# EAGLE board CT_schematic (EAGLE 7.6.0)

Size 100 x 80 mm. Coordinates in mm from the lower left corner, seen from the top.
Outline: 0,0 100,0 100,80 0,80 0,0
Copper layers (1*16): Top 0.035mm / dielectric 1.5mm / Bottom 0.035mm
Design rules "default": minimum track width 10mil, minimum drill 24mil, track to track 8mil, track to pad 8mil, pad to pad 8mil, via to via 8mil, smd to smd 8mil, copper to edge 40mil, drill to drill 8mil, minimum pad ring 10mil, minimum via ring 8mil, stop-mask expansion 4mil, vias tented up to drill 0mil, thermal gap 10mil

## Footprints (pad centres in the part's own frame; a part is rotated, then mirrored left to right if it is on the bottom)
C0603 = smd 0.8 x 0.8: 1 -0.762,0; 2 0.762,0
C0402 = smd 0.5 x 0.5: 1 -0.508,0; 2 0.508,0
C1206 = smd 1.3 x 1.6: 1 -1.524,0; 2 1.524,0
C0805 = smd 1.2 x 1.3: 1 -1.016,0; 2 1.016,0
C1210 = smd 1.2 x 2.5: 1 -1.524,0; 2 1.524,0
EXV-9H = smd 3.505 x 1.676: 1 -2.857,0; 2 2.857,0
PJ-037B_PACKAGE = drill 3.7 square: 1 12,0 | drill 3.2 square: 2 6,0
R0603 = smd 0.8 x 0.8: 1 -0.762,0; 2 0.762,0
LQFP144 = smd 0.35 x 1.35: 1 -8.75,-10.625; 2 -8.25,-10.625; 3 -7.75,-10.625; 4 -7.25,-10.625; 5 -6.75,-10.625; 6 -6.25,-10.625; 7 -5.75,-10.625; 8 -5.25,-10.625; 9 -4.75,-10.625; 10 -4.25,-10.625; 11 -3.75,-10.625; 12 -3.25,-10.625; 13 -2.75,-10.62; 14 -2.25,-10.625; 15 -1.75,-10.625; 16 -1.25,-10.625; 17 -0.75,-10.625; 18 -0.25,-10.625; 19 0.25,-10.625; 20 0.75,-10.625; 21 1.25,-10.625; 22 1.75,-10.625; 23 2.25,-10.625; 24 2.75,-10.62; 25 3.25,-10.625; 26 3.75,-10.625; 27 4.25,-10.625; 28 4.75,-10.625; 29 5.25,-10.625; 30 5.75,-10.625; 31 6.25,-10.625; 32 6.75,-10.625; 33 7.25,-10.625; 34 7.75,-10.625; 35 8.25,-10.625; 36 8.75,-10.625; 73 8.75,10.625; 74 8.25,10.625; 75 7.75,10.625; 76 7.25,10.625; 77 6.75,10.625; 78 6.25,10.625; 79 5.75,10.625; 80 5.25,10.625; 81 4.75,10.625; 82 4.25,10.625; 83 3.75,10.625; 84 3.25,10.625; 85 2.75,10.625; 86 2.25,10.625; 87 1.75,10.625; 88 1.25,10.625; 89 0.75,10.625; 90 0.25,10.625; 91 -0.25,10.625; 92 -0.75,10.625; 93 -1.25,10.625; 94 -1.75,10.625; 95 -2.25,10.625; 96 -2.75,10.625; 97 -3.25,10.625; 98 -3.75,10.625; 99 -4.25,10.625; 100 -4.75,10.625; 101 -5.25,10.625; 102 -5.75,10.625; 103 -6.25,10.625; 104 -6.75,10.625; 105 -7.25,10.625; 106 -7.75,10.625; 107 -8.25,10.625; 108 -8.75,10.625 | smd 1.35 x 0.35: 37 10.625,-8.75; 38 10.625,-8.25; 39 10.625,-7.75; 40 10.625,-7.25; 41 10.625,-6.75; 42 10.625,-6.25; 43 10.625,-5.75; 44 10.625,-5.25; 45 10.625,-4.75; 46 10.625,-4.25; 47 10.625,-3.75; 48 10.625,-3.25; 49 10.625,-2.75; 50 10.625,-2.25; 51 10.625,-1.75; 52 10.625,-1.25; 53 10.625,-0.75; 54 10.625,-0.25; 55 10.625,0.25; 56 10.625,0.75; 57 10.625,1.25; 58 10.625,1.75; 59 10.625,2.25; 60 10.625,2.75; 61 10.625,3.25; 62 10.625,3.75; 63 10.625,4.25; 64 10.625,4.75; 65 10.625,5.25; 66 10.625,5.75; 67 10.625,6.25; 68 10.625,6.75; 69 10.625,7.25; 70 10.625,7.75; 71 10.625,8.25; 72 10.625,8.75; 109 -10.625,8.75; 110 -10.625,8.25; 111 -10.625,7.75; 112 -10.625,7.25; 113 -10.625,6.75; 114 -10.625,6.25; 115 -10.625,5.75; 116 -10.625,5.25; 117 -10.625,4.75; 118 -10.625,4.25; 119 -10.625,3.75; 120 -10.625,3.25; 121 -10.625,2.75; 122 -10.625,2.25; 123 -10.625,1.75; 124 -10.625,1.25; 125 -10.625,0.75; 126 -10.625,0.25; 127 -10.625,-0.25; 128 -10.625,-0.75; 129 -10.625,-1.25; 130 -10.625,-1.75; 131 -10.625,-2.25; 132 -10.625,-2.75; 133 -10.625,-3.25; 134 -10.625,-3.75; 135 -10.625,-4.25; 136 -10.625,-4.75; 137 -10.625,-5.25; 138 -10.625,-5.75; 139 -10.625,-6.25; 140 -10.625,-6.75; 141 -10.625,-7.25; 142 -10.625,-7.75; 143 -10.625,-8.25; 144 -10.625,-8.75
SOIC-8 = smd 1.6 x 0.6: 1 -2.7,1.905 | smd 1.55 x 0.6: 2 -2.7,0.635; 3 -2.7,-0.635; 4 -2.7,-1.905; 5 2.7,-1.905; 6 2.7,-0.635; 7 2.7,0.635; 8 2.7,1.905
QFN-32 = smd 0.6 x 0.3: 1 -2.3,1.75; 2 -2.3,1.25; 3 -2.3,0.75; 4 -2.3,0.25; 5 -2.3,-0.25; 6 -2.3,-0.75; 7 -2.3,-1.25; 8 -2.3,-1.75; 17 2.3,-1.75; 18 2.3,-1.25; 19 2.3,-0.75; 20 2.3,-0.25; 21 2.3,0.25; 22 2.3,0.75; 23 2.3,1.25; 24 2.3,1.75 | smd 0.3 x 0.6: 9 -1.75,-2.3; 10 -1.25,-2.3; 11 -0.75,-2.3; 12 -0.25,-2.3; 13 0.25,-2.3; 14 0.75,-2.3; 15 1.25,-2.3; 16 1.75,-2.3; 25 1.75,2.3; 26 1.25,2.3; 27 0.75,2.3; 28 0.25,2.3; 29 -0.25,2.3; 30 -0.75,2.3; 31 -1.25,2.3; 32 -1.75,2.3 | smd 3.2 x 3.2: EXP 0,0
SJ-43515TS-SMT-TR = smd 2.2 x 3: 1 0.6,-7.4; 4 3.4,-7.4 | smd 3 x 3: 2 12.8,-7.4; 5 17,-3 | smd 2 x 3: 3 5.3,0; 6 2.5,0 | drill 1.8: P$7 4.5,-3.69; P$8 11.54,-3.69
WM-64PC = drill 0.6 pad 1: 1 -1,0.95; 2 -1,-0.95
ABLS-25.000MHZ-B2F-T = smd 5.6 x 2.8: 1 -3.81,0; 2 5.69,0
ASEK = smd 1.4 x 1: 1 -1.1,-0.8; 2 1.1,-0.8; 3 1.1,0.8; 4 -1.1,0.8
ASFL1 = smd 1.7 x 1.5: 1 -1.27,-1.1; 2 1.27,-1.1; 3 1.27,1.1; 4 -1.27,1.1
WSON-8 = smd 0.3 x 0.6: 1 -0.75,0; 2 0.05,0; 3 0.85,0; 4 1.65,0; 5 1.65,3.8; 6 0.85,3.8; 7 0.05,3.8; 8 -0.75,3.8 | smd 3 x 2.6: PAD 0.45,1.9
SON-6 = smd 0.55 x 0.3: 1 -0.355,0.5 | smd 0.52 x 0.3: 2 -0.37,0; 3 -0.37,-0.5; 4 0.37,-0.5; 5 0.37,0; 6 0.37,0.5
SW_4-1437565-2 = smd 1.4 x 2.1: 1 -2.23,4.55; 2 -2.23,-4.55; 3 2.23,4.55; 4 2.23,-4.55
LGM67K-G1J2-24-Z = smd 0.8 x 1.4: A -2,0; C 0,0
NC7SZ125M5X = smd 1.3 x 0.7: 1 -1.3,0.95; 2 -1.3,0; 3 -1.3,-0.95; 4 1.3,-0.95; 5 1.3,0.95

## Placement (x,y rotation side)
C1  1e-07  [C0603]  -19.05,85.09 0 top  (outside the outline)
C2  1e-07  [C0603]  -22.86,85.09 0 top  (outside the outline)
C3  1e-07  [C0603]  -26.67,85.09 0 top  (outside the outline)
C4  1e-07  [C0603]  -30.48,85.09 0 top  (outside the outline)
C5  1e-07  [C0603]  -34.29,85.09 0 top  (outside the outline)
C6  1e-07  [C0603]  -38.1,85.09 0 top  (outside the outline)
C7  1e-07  [C0603]  -41.91,85.09 0 top  (outside the outline)
C8  1e-07  [C0603]  -45.72,85.09 0 top  (outside the outline)
C9  1e-07  [C0603]  -49.53,85.09 0 top  (outside the outline)
C10  1e-07  [C0603]  -53.34,85.09 0 top  (outside the outline)
C11  1e-07  [C0603]  -57.15,85.09 0 top  (outside the outline)
C12  4.7e-06  [C0603]  -15.24,85.09 0 top  (outside the outline)
C13  1e-07  [C0603]  -60.96,85.09 0 top  (outside the outline)
C14  1e-08  [C0603]  -64.77,85.09 0 top  (outside the outline)
C15  1e-06  [C0603]  -68.58,85.09 0 top  (outside the outline)
C16  1e-11  [C0402]  -64.77,90.17 0 top  (outside the outline)
C17  1e-11  [C0402]  -68.58,90.17 0 top  (outside the outline)
C18  1e-08  [C0402]  -72.39,90.17 0 top  (outside the outline)
C19  1e-08  [C0402]  -76.2,90.17 0 top  (outside the outline)
C20  1e-08  [C0402]  -80.01,90.17 0 top  (outside the outline)
C21  1e-06  [C0603]  -72.39,85.09 0 top  (outside the outline)
C22  1e-06  [C0603]  -76.2,85.09 0 top  (outside the outline)
C23  1e-06  [C0603]  -80.01,85.09 0 top  (outside the outline)
C24  1e-06  [C0603]  -83.82,85.09 0 top  (outside the outline)
C25  1e-06  [C0603]  -15.24,90.17 0 top  (outside the outline)
C26  1e-06  [C0603]  -19.05,90.17 0 top  (outside the outline)
C27  1e-06  [C0603]  -22.86,90.17 0 top  (outside the outline)
C28  1e-07  [C0402]  -83.82,90.17 0 top  (outside the outline)
C29  1e-07  [C0402]  -15.24,95.25 0 top  (outside the outline)
C30  1e-07  [C0402]  -19.05,95.25 0 top  (outside the outline)
C31  1e-07  [C0402]  -22.86,95.25 0 top  (outside the outline)
C32  1e-06  [C0603]  -26.67,90.17 0 top  (outside the outline)
C33  1e-08  [C0402]  -26.67,95.25 0 top  (outside the outline)
C34  1e-08  [C0402]  -30.48,95.25 0 top  (outside the outline)
C35  1e-08  [C0402]  -34.29,95.25 0 top  (outside the outline)
C36  1e-05  [C1206]  -55.88,72.39 0 top  (outside the outline)
C37  1e-05  [C0805]  -73.66,72.39 0 top  (outside the outline)
C38  1e-08  [C0402]  -38.1,95.25 0 top  (outside the outline)
C39  1e-05  [C1206]  -62.23,72.39 0 top  (outside the outline)
C40  1e-05  [C1210]  -49.53,72.39 0 top  (outside the outline)
C41  1e-07  [C0402]  -41.91,95.25 0 top  (outside the outline)
C42  0.0001  [EXV-9H]  -57.15,64.77 0 top  (outside the outline)
C43  0.0001  [EXV-9H]  -68.58,64.77 0 top  (outside the outline)
C44  1e-08  [C0402]  -45.72,95.25 0 top  (outside the outline)
J1  PJ-037B  [PJ-037B_PACKAGE]  -83.82,30.48 0 top  (outside the outline)
R2  1000.0  [R0603]  -30.48,90.17 0 top  (outside the outline)
R4  4700.0  [R0603]  -34.29,90.17 0 top  (outside the outline)
R5  10000.0  [R0603]  -25.4,80.01 0 top  (outside the outline)
R6  10000.0  [R0603]  -30.48,80.01 0 top  (outside the outline)
R7  10000.0  [R0603]  -35.56,80.01 0 top  (outside the outline)
R8  10000.0  [R0603]  -40.64,80.01 0 top  (outside the outline)
R9  10000.0  [R0603]  -45.72,80.01 0 top  (outside the outline)
R10  10000.0  [R0603]  -50.8,80.01 0 top  (outside the outline)
R11  10000.0  [R0603]  -55.88,80.01 0 top  (outside the outline)
R12  10000.0  [R0603]  -60.96,80.01 0 top  (outside the outline)
R13  10000.0  [R0603]  -66.04,80.01 0 top  (outside the outline)
R14  10000.0  [R0603]  -71.12,80.01 0 top  (outside the outline)
R15  1270.0  [R0603]  -38.1,90.17 0 top  (outside the outline)
R16  1270.0  [R0603]  -41.91,90.17 0 top  (outside the outline)
R17  100000.0  [R0603]  -78.74,71.12 0 top  (outside the outline)
R18  200.0  [R0603]  -45.72,90.17 0 top  (outside the outline)
R19  1000.0  [R0603]  -49.53,90.17 0 top  (outside the outline)
R20  100000.0  [R0603]  -83.82,71.12 0 top  (outside the outline)
R21  2231.0  [R0603]  -53.34,90.17 0 top  (outside the outline)
R22  1000.0  [R0603]  -57.15,90.17 0 top  (outside the outline)
R23  10000.0  [R0603]  -76.2,80.01 0 top  (outside the outline)
R24  10000.0  [R0603]  -81.28,80.01 0 top  (outside the outline)
R25  9100.0  [R0603]  -60.96,90.17 0 top  (outside the outline)
R26  680000.0  [R0603]  -15.24,80.01 0 top  (outside the outline)
R27  120000.0  [R0603]  -20.32,80.01 0 top  (outside the outline)
U1  STM32L162ZDT6  [LQFP144]  -24.13,11.43 0 top  (outside the outline)
U2  AT25160B-SSHL-T  [SOIC-8]  -69.85,43.18 0 top  (outside the outline)
U3  AT25512N-SH-T  [SOIC-8]  -38.1,55.88 0 top  (outside the outline)
U4  AT25M02-SSHD-T  [SOIC-8]  -24.13,55.88 0 top  (outside the outline)
U5  SGTL5000XNAA3  [QFN-32]  -53.34,43.18 0 top  (outside the outline)
U6  SJ-43515TS-SMT-TR  [SJ-43515TS-SMT-TR]  -62.23,10.16 0 top  (outside the outline)
U7  SJ-43515TS-SMT-TR  [SJ-43515TS-SMT-TR]  -39.37,33.02 0 top  (outside the outline)
U8  SJ-43515TS-SMT-TR  [SJ-43515TS-SMT-TR]  -67.31,33.02 0 top  (outside the outline)
U9  WM-64PCT  [WM-64PC]  -39.37,43.18 0 top  (outside the outline)
U10  ABLS-25.000MHZ-B2F-T  [ABLS-25.000MHZ-B2F-T]  -26.67,73.66 0 top  (outside the outline)
U11  ASEK-32.768KHz-ECST  [ASEK]  -48.26,64.77 0 top  (outside the outline)
U12  ASFL-24.57MHZ-NCS  [ASFL1]  -27.94,64.77 0 top  (outside the outline)
U13  LP3878SDX-ADJ/NOPB  [WSON-8]  -59.69,53.34 0 top  (outside the outline)
U14  LP3878SDX-ADJ/NOPB  [WSON-8]  -80.01,53.34 0 top  (outside the outline)
U15  TPS3895ADRYR  [SON-6]  -48.26,93.98 0 top  (outside the outline)
U16  4-1437565-2  [SW_4-1437565-2]  -27.94,44.45 0 top  (outside the outline)
U17  Q65110A2395  [LGM67K-G1J2-24-Z]  -38.1,72.39 0 top  (outside the outline)
U18  nc7sz125m5x  [NC7SZ125M5X]  -67.31,71.12 0 top  (outside the outline)

## Library data of the parts
C1-C44 J1 R2 R4-R27 U1-U18 = circuit_tree

## Nets
CLK_CRYSTAL_U1_23: C16.1 U1.23 U10.1
CLK_CRYSTAL_U1_24: C17.1 U1.24 U10.2
CLK_U1_8: U1.8 U11.3
CLK_U5_21: U5.21 U12.3
GND: C1.2 C2.2 C3.2 C4.2 C5.2 C6.2 C7.2 C8.2 C9.2 C10.2 C11.2 C12.2 C13.2 C14.2 C15.2 C16.2 C17.2 C18.2 C19.2 C20.2 C28.2 C29.2 C30.2 C31.2 C32.2 C33.2 C34.2 C35.2 C36.2 C37.2 C38.2 C39.2 C40.2 C41.2 C42.2 C43.2 C44.2 J1.2 R2.2 R5.2 R16.2 R19.2 R22.2 R25.2 R27.2 U1.16 U1.30 U1.31 U1.38 U1.51 U1.61 U1.71 U1.83 U1.94 U1.107 U1.120 U1.130 U1.143 U2.4 U3.4 U4.4 U5.1 U5.3 U5.7 U5.EXP U7.1 U8.1 U9.2 U11.2 U12.2 U13.3 U13.PAD U14.3 U14.PAD U15.2 U17.C U18.1 U18.3
NET_U1_6: C13.1 U1.6
NET_U1_25: R4.1 U1.25 U18.4
NET_U1_138: R5.1 U1.138
NET_U1_141: U17.A
NET_U1_142: U16.3 U16.4
NET_U2_3: R6.1 U2.3
NET_U2_7: R8.1 U2.7
NET_U3_3: R9.1 U3.3
NET_U3_7: R11.1 U3.7
NET_U4_3: R12.1 U4.3
NET_U4_7: R14.1 U4.7
NET_U5_10: C31.1 U5.10
NET_U5_29: R15.1 U5.29
NET_U5_31: R16.1 U5.31
NET_U6_1: U5.4 U6.1
NET_U6_2: U5.2 U6.2
NET_U6_5: U5.6 U6.5
NET_U7_2: C22.1 U7.2
NET_U7_5: C21.1 U7.5
NET_U7_11: C22.2
NET_U7_12: C21.2
NET_U8_2: C24.1 C25.1 U8.2
NET_U8_5: C23.1 U8.5
NET_U8_13: C24.2 C25.2
NET_U8_14: C23.2
NET_U9_1: C26.1 C27.1 C32.1 U5.16 U9.1
NET_U9_15: C26.2 C27.2
NET_U13_1: C35.1 U13.1
NET_U13_6: R18.2 R19.1 U13.6
NET_U13_8: R17.1 U13.8
NET_U14_1: C38.1 U14.1
NET_U14_6: R21.2 R22.1 U14.6
NET_U14_8: R20.1 U14.8
NET_U15_1: R24.1 R25.1 U15.1
NET_U15_3: R26.2 R27.1 U15.3
NET_U15_4: R23.1 U15.4 U18.2
NET_U16_1: R2.1 U16.1 U16.2
PROC_I2S2_CK: U1.74 U5.24
PROC_I2S2_SD: U1.76 U5.26
PROC_I2S2_WS: U1.73 U5.23
PROC_SPI1_MISO: U1.42 U3.2
PROC_SPI1_MOSI: U1.43 U3.5
PROC_SPI1_NSS: R10.1 U1.65 U3.1
PROC_SPI1_SCK: U1.41 U3.6
PROC_SPI2_MISO: U1.75 U2.2
PROC_SPI2_MOSI: U1.118 U2.5
PROC_SPI2_NSS: R7.1 U1.114 U2.1
PROC_SPI2_SCK: U1.115 U2.6
PROC_SPI3_MISO: U4.2
PROC_SPI3_MOSI: U4.5
PROC_SPI3_NSS: R13.1 U4.1
PROC_SPI3_SCK: U4.6
VCC_S1_8V3: C36.1 C39.1 C42.1 C43.1 J1.1 R17.2 R20.2 U13.4 U14.4
VCC_TIER1_1V2: C28.1 C37.1 R18.1 U5.30 U13.5
VCC_TIER1_3V3: C1.1 C2.1 C3.1 C4.1 C5.1 C6.1 C7.1 C8.1 C9.1 C10.1 C11.1 C12.1 C14.1 C15.1 C18.1 C19.1 C20.1 C29.1 C30.1 C33.1 C34.1 C40.1 C41.1 C44.1 R4.2 R6.2 R7.2 R8.2 R9.2 R10.2 R11.2 R12.2 R13.2 R14.2 R15.2 R21.1 R23.2 R24.2 R26.1 U1.17 U1.32 U1.33 U1.39 U1.52 U1.62 U1.72 U1.84 U1.95 U1.108 U1.121 U1.131 U1.144 U2.8 U3.8 U4.8 U5.5 U5.20 U11.4 U12.4 U14.5 U15.6 U18.5

## Tracks (layer width: path | path; a pad name or v marks a point on that pad's centre or on a via)
CLK_CRYSTAL_U1_23  (2 unrouted)
CLK_CRYSTAL_U1_24  (2 unrouted)
CLK_U1_8  (1 unrouted)
CLK_U5_21  (1 unrouted)
GND  (77 unrouted)
NET_U1_6  (1 unrouted)
NET_U1_25  (2 unrouted)
NET_U1_138  (1 unrouted)
NET_U1_142  (1 unrouted)
NET_U2_3  (1 unrouted)
NET_U2_7  (1 unrouted)
NET_U3_3  (1 unrouted)
NET_U3_7  (1 unrouted)
NET_U4_3  (1 unrouted)
NET_U4_7  (1 unrouted)
NET_U5_10  (1 unrouted)
NET_U5_29  (1 unrouted)
NET_U5_31  (1 unrouted)
NET_U6_1  (1 unrouted)
NET_U6_2  (1 unrouted)
NET_U6_5  (1 unrouted)
NET_U7_2  (1 unrouted)
NET_U7_5  (1 unrouted)
NET_U8_2  (2 unrouted)
NET_U8_5  (1 unrouted)
NET_U8_13  (1 unrouted)
NET_U9_1  (4 unrouted)
NET_U9_15  (1 unrouted)
NET_U13_1  (1 unrouted)
NET_U13_6  (2 unrouted)
NET_U13_8  (1 unrouted)
NET_U14_1  (1 unrouted)
NET_U14_6  (2 unrouted)
NET_U14_8  (1 unrouted)
NET_U15_1  (2 unrouted)
NET_U15_3  (2 unrouted)
NET_U15_4  (2 unrouted)
NET_U16_1  (2 unrouted)
PROC_I2S2_CK  (1 unrouted)
PROC_I2S2_SD  (1 unrouted)
PROC_I2S2_WS  (1 unrouted)
PROC_SPI1_MISO  (1 unrouted)
PROC_SPI1_MOSI  (1 unrouted)
PROC_SPI1_NSS  (2 unrouted)
PROC_SPI1_SCK  (1 unrouted)
PROC_SPI2_MISO  (1 unrouted)
PROC_SPI2_MOSI  (1 unrouted)
PROC_SPI2_NSS  (2 unrouted)
PROC_SPI2_SCK  (1 unrouted)
PROC_SPI3_NSS  (1 unrouted)
VCC_S1_8V3  (8 unrouted)
VCC_TIER1_1V2  (4 unrouted)
VCC_TIER1_3V3  (61 unrouted)